# EAGLE board Adafruit Ultimate GPS USB Micro B (EAGLE 9.3.2)
REV: A
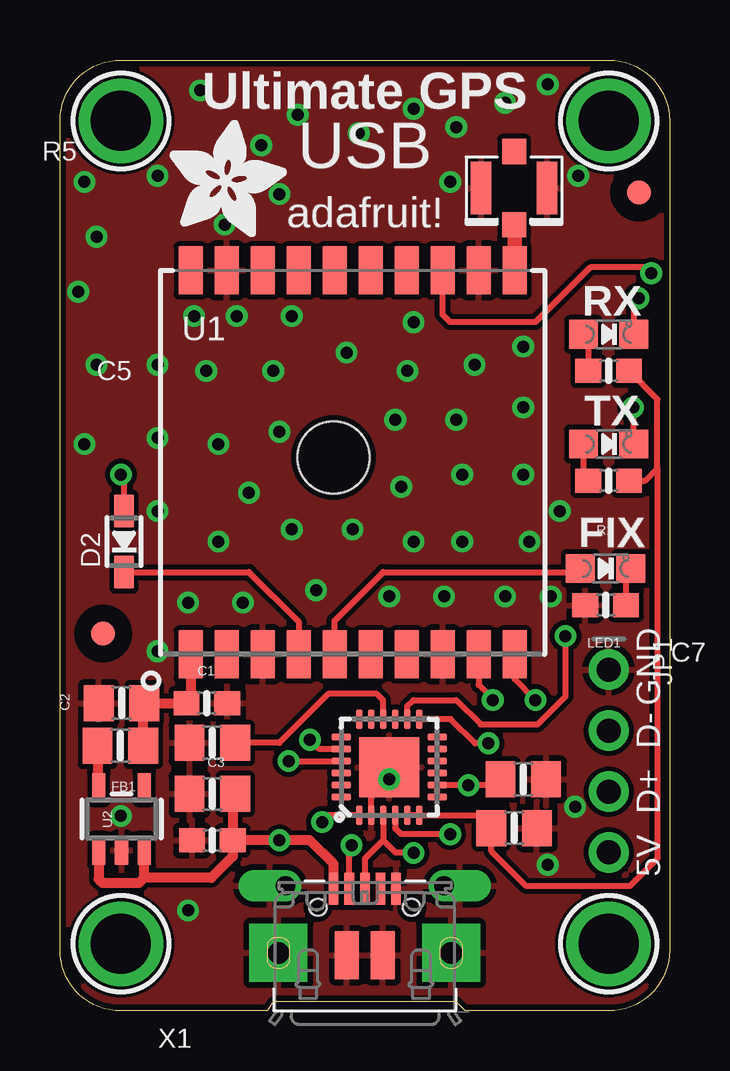
[diagram p0: board, top side]
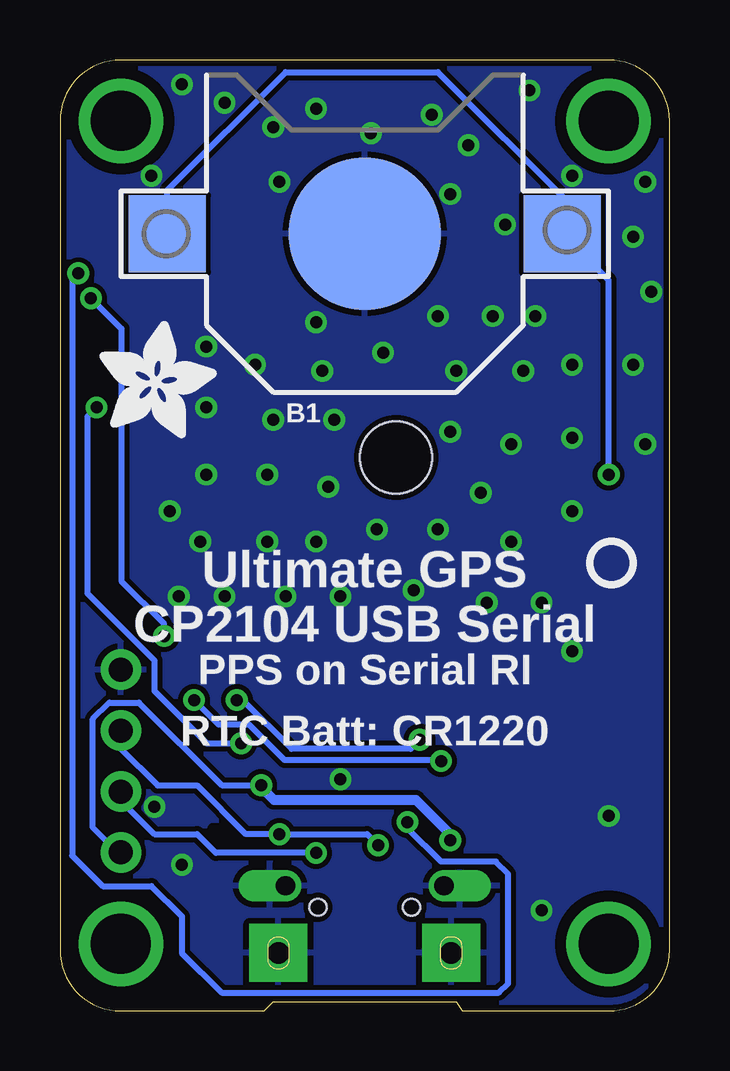
[diagram p1: board, bottom side, seen from below]

Size 25.4 x 39.62 mm. Coordinates in mm from the lower left corner, seen from the top.
Outline: 0,2.54 0,37.08 arc-90 2.54,39.62 22.86,39.62 arc-90 25.4,37.08 25.4,2.54 arc-90 22.86,0 16.89,0 16.51,0.38 8.89,0.38 8.64,0 2.54,0 arc-90 0,2.54
Copper layers (1*16): Top 0.035mm / dielectric 1.5mm / Bottom 0.035mm
Design rules "adafruit": minimum track width 8mil, minimum drill 15.5mil, track to track 8mil, track to pad 8mil, pad to pad 8mil, via to via 8mil, smd to smd 8mil, copper to edge 10mil, drill to drill 8mil, minimum pad ring 10mil, minimum via ring 8mil, stop-mask expansion 2mil, vias tented up to drill 20mil, thermal gap 10mil
bRestrict: area 18.9,7.1 to 19.1,7.6

## Footprints (pad centres in the part's own frame; a part is rotated, then mirrored left to right if it is on the bottom)
CR1220 = smd 3.2 x 3.2: +$1 -8.225,0; +$2 8.225,0 | smd 6.35 x 6.35: - 0,0
0603-NO = smd 1.075 x 1: 1 -0.85,0; 2 0.85,0
0805-NO = smd 1.24 x 1.5: 1 -0.95,0; 2 0.95,0
SOD-323 = smd 1.35 x 0.8: A 1.27,0; C -1.27,0
CHIPLED_0805_NOOUTLINE = smd 1.2 x 1.2: A 0,-1.05; C 0,1.05
FIDUCIAL_1MM = smd 1 x 1: 1 0,0
1X04_ROUND = drill 1 pad 1.676: 1 -3.81,0; 2 -1.27,0; 3 1.27,0; 4 3.81,0
FGPMMOPA6H = smd 2 x 1: P$1 -8,6.75; P$2 -8,5.25; P$3 -8,3.75; P$4 -8,2.25; P$5 -8,0.75; P$6 -8,-0.75; P$7 -8,-2.25; P$8 -8,-3.75; P$9 -8,-5.25; P$10 -8,-6.75; P$11 8,-6.75; P$12 8,-5.25; P$13 8,-3.75; P$14 8,-2.25; P$15 8,-0.75; P$16 8,0.75; P$17 8,2.25; P$18 8,3.75; P$19 8,5.25; P$20 8,6.75 | hole 3: 0.2,0.8
SOT23-5 = smd 0.55 x 1.2: 1 -0.95,-1.3; 2 0,-1.3; 3 0.95,-1.3; 4 0.95,1.3; 5 -0.95,1.3
QFN24_4MM_SMSC = smd 0.8 x 0.28: 1 -2,1.25; 2 -2,0.75; 3 -2,0.25; 4 -2,-0.25; 5 -2,-0.75; 6 -2,-1.25; 13 2,-1.25; 14 2,-0.75; 15 2,-0.25; 16 2,0.25; 17 2,0.75; 18 2,1.25 | smd 0.28 x 0.8: 7 -1.25,-2; 8 -0.75,-2; 9 -0.25,-2; 10 0.25,-2; 11 0.75,-2; 12 1.25,-2; 19 1.25,2; 20 0.75,2; 21 0.25,2; 22 -0.25,2; 23 -0.75,2; 24 -1.25,2 | smd 2.5 x 2.5: THERM 0,0
MOUNTINGHOLE_2.5_PLATED = drill 2.5 pad 3.2: P$1 0,0
U.FL = smd 2.2 x 0.85: P$1 0,1.375; P$2 0,-1.375 | smd 1.05 x 1: P$3 1.525,0; P$4 -1.525,0
4UCONN_20329_V2 = smd 1 x 2: BASE@1 -0.75,-2; BASE@2 0.75,-2 | smd 0.4 x 1.35: D+ 0,0.775; D- -0.65,0.775; GND 1.3,0.775; ID 0.65,0.775; VBUS -1.3,0.775 | drill 0.8 pad 1.143 offset: SPRT@1 -3.3,0.9; SPRT@2 3.3,0.9 | drill 0.9 pad 2.413 square: SPRT@3 -3.6,-1.9; SPRT@4 3.6,-1.9 | hole 0.7: -1.95,0; 1.95,0

## Placement (x,y rotation side)
B1  CR1220  [CR1220]  12.7,32.38 0 bottom
C1  0.1uF  [0603-NO]  6.12,12.83 0 top
C2  10uF  [0805-NO]  2.56,12.83 180 top
C3  10uF  [0805-NO]  6.35,9.04 180 top
C4  10uF  [0805-NO]  6.35,11.18 180 top
C5  10uF  [0805-NO]  19.3,9.65 0 top
C6  10uF  [0805-NO]  18.92,7.62 0 top
C7  0.1uF  [0603-NO]  6.35,7.11 180 top
D2  CUS520  [SOD-323]  2.67,19.56 90 top
D3  YELLOW  [CHIPLED_0805_NOOUTLINE]  22.86,28.19 270 top
D4  YELLOW  [CHIPLED_0805_NOOUTLINE]  22.86,23.62 270 top
FB1  Ferrite  [0805-NO]  2.52,11.05 0 top
FID1  FIDUCIAL_1MM  [FIDUCIAL_1MM]  24.13,34.1 0 top
FID2  FIDUCIAL_1MM  [FIDUCIAL_1MM]  1.8,15.73 0 top
JP1  [1X04_ROUND]  22.86,10.41 270 top
LED1  RED  [CHIPLED_0805_NOOUTLINE]  22.73,18.44 270 top
R1  1K  [0603-NO]  22.73,16.91 0 top
R4  1K  [0603-NO]  22.86,26.67 0 top
R5  1K  [0603-NO]  22.86,22.1 0 top
U1  FGPMMOPA6H  [FGPMMOPA6H]  12.19,22.86 90 top
U2  AP2112-3.3K  [SOT23-5]  2.56,8 0 top
U3  CP2104  [QFN24_4MM_SMSC]  13.72,10.16 90 top
U$8  MOUNTINGHOLE2.5  [MOUNTINGHOLE_2.5_PLATED]  2.54,37.08 0 top
U$9  MOUNTINGHOLE2.5  [MOUNTINGHOLE_2.5_PLATED]  22.86,37.08 0 top
U$13  [ADAFRUIT_5MM]  4.57,32.26 0 top
U$16  [PCBFEAT-REV-040]  2.41,18.67 0 bottom
U$18  [ADAFRUIT_5MM]  23.75,23.88 0 bottom
U$20  U.FL  [U.FL]  18.92,34.29 270 top
U$35  MOUNTINGHOLE2.5  [MOUNTINGHOLE_2.5_PLATED]  22.86,2.79 0 top
U$36  MOUNTINGHOLE2.5  [MOUNTINGHOLE_2.5_PLATED]  2.54,2.79 0 top
X1  20329  [4UCONN_20329_V2]  12.7,4.32 0 top

## Library data of the parts
B1 C1-C7 D2-D4 FB1 JP1 LED1 R1 R4 R5 U1-U3 U$13 U$16 U$18 U$20 X1 = microbuilder
FID1 FID2 U$8 U$9 U$35 U$36 = microbuilder; BOM: EXCLUDE

## Nets
1PPS: U1.P$13 U3.1
3.3V: C1.1 C2.1 FB1.2 U1.P$1
D+: JP1.3 U3.3 X1.D+
D-: JP1.2 U3.4 X1.D-
FIX: LED1.A U1.P$5
GND: B1.- C1.2 C2.2 C3.2 C4.2 C5.2 C6.2 C7.2 JP1.1 R1.1 U1.P$3 U1.P$8 U1.P$12 U1.P$19 U2.2 U3.2 U3.THERM U$20.P$1 U$20.P$2 X1.BASE@1 X1.BASE@2 X1.GND X1.SPRT@1 X1.SPRT@2 X1.SPRT@3 X1.SPRT@4
GPS_RX: U1.P$10 U3.21
GPS_TX: U1.P$9 U3.20
N$1: B1.+$1 B1.+$2 D2.A
N$2: LED1.C R1.2
N$3: FB1.1 U2.5
N$4: U1.P$11 U$20.P$3
N$8: D3.A R4.1
N$9: D4.A R5.1
N$10: D3.C U3.14
N$11: D4.C U3.13
VBACKUP: D2.C U1.P$4
VBUS: C3.1 C5.1 C7.1 JP1.4 U2.1 U2.3 U3.7 U3.8 X1.VBUS
VDDIO: C6.1 R4.2 R5.2 U3.5 U3.6
VPP: C4.1 U3.16

## Tracks (layer width: path | path; a pad name or v marks a point on that pad's centre or on a via)
1PPS  (via drill 0.5)
  Top 0.254: U3.1 11.21,8.16 v10.92,7.87 | v24.64,30.73 24.64,30.99 22.1,30.99 19.81,28.7 16.26,28.7 15.94,29.02 U1.P$13
  Bottom 0.254: v24.64,30.73 24.89,30.48 24.89,6.48 23.62,5.21 21.59,5.21 20.32,3.94 20.32,2.41 18.67,0.76 7.11,0.76 6.73,1.14 6.73,5.71 7.24,6.22 9.53,6.22 10.92,7.62 v10.92,7.87
3.3V
  Top 0.406: U1.P$1 5.44,13 C1.1 C2.1 3.47,12.78 FB1.2
D+  (via drill 0.5)
  Top 0.254: U3.3 13.47,7.12 | 13.47,7.12 12.7,6.35 X1.D+ | 13.47,7.12 13.98,6.6 14.73,6.6 v14.73,6.58
  Bottom 0.254: v14.73,6.58 18.9,6.58 19.68,7.37 21.46,7.37 22.86,8.76 JP1.3
D-  (via drill 0.5)
  Top 0.254: X1.D- 12.05,6.81 v12.15,6.9 | v16.26,7.37 14.22,7.37 13.97,7.62 U3.4
  Bottom 0.254: v12.15,6.9 12.61,7.37 v16.26,7.37 17.65,7.37 19.68,9.4 21.34,9.4 22.86,10.92 JP1.2
FIX
  Top 0.254: U1.P$5 11.44,16.27 13.46,18.29 21.53,18.29 LED1.A
GND  (via drill 0.5)
  Top 0.254: U3.2 12.97,8.9 v13.72,9.65
  other vias: 2.54,8.13 4.06,14.99 5.33,17.02 7.62,17.02 10.67,17.53 13.72,17.27 16,17.27 18.54,17.27 5.59,28.96 7.37,28.96 9.65,28.96 14.73,28.7 19.3,27.69 6.86,32.77 16.26,34.54 16.51,36.83 21.59,34.8 20.32,38.61 14.73,37.59 12.45,36.58 9.14,34.04 8.38,36.07 1.02,34.54 1.52,32.26 0.76,29.97 1.52,26.92 1.02,23.62 4.06,23.88 4.06,26.92 6.1,26.67 8.89,26.67 11.94,27.43 14.48,26.67 17.27,26.92 19.3,25.15 16.51,24.64 13.97,24.64 9.14,24.13 6.6,23.62 4.06,20.83 6.6,19.56 7.87,21.59 9.65,20.07 12.19,20.07 14.22,21.84 16.76,22.35 19.3,22.35 19.56,19.56 16.76,19.56 14.73,19.56 21.46,8.51 20.32,6.1 20.45,17.27 9.91,37.34 18.54,37.85 5.84,38.35 4.06,34.8 20.83,20.83 5.33,4.19
  pour Top (isolate 0.203): 0,0 0,39.62 25.4,39.62 25.4,0
  pour Bottom (isolate 0.203): 0,0 0,39.62 25.4,39.62 25.4,0
GPS_RX  (via drill 0.5)
  Top 0.254: v9.53,10.41 9.56,10.38 11.69,10.38 U3.21 | v19.81,12.95 18.94,13.82 U1.P$10
  Bottom 0.254: v9.53,10.41 9.58,10.46 16.05,10.46 17.53,11.94 18.8,11.94 v19.81,12.95
GPS_TX  (via drill 0.5)
  Top 0.254: U3.20 10.81,10.91 v10.41,11.3 | U1.P$9 17.44,13.59 18.03,13 v18.03,12.95
  Bottom 0.254: v10.41,11.3 10.79,10.92 15.75,10.92 17.78,12.95 v18.03,12.95
N$1  (via drill 0.5)
  Top 0.254: D2.A 2.67,22.22 v2.54,22.35
  Bottom 0.254: v2.54,22.35 2.54,30.45 4.08,31.99 | 4.08,31.99 B1.+$2 | B1.+$1 20.93,34.19 16,39.12 9.65,39.12 4.08,33.54 4.08,31.99
N$2
  Top 0.254: LED1.C 23.58,18.24 R1.2
N$3
  Top 0.406: FB1.1 1.57,9.35 U2.5
N$4
  Top 0.61: U1.P$11 18.94,32.75 U$20.P$3
N$8
  Top 0.254: D3.A 22.01,27.99 R4.1
N$9
  Top 0.254: D4.A 21.81,22.3 R5.1
N$10  (via drill 0.5)
  Top 0.254: U3.14 14.47,12.69 14.73,12.95 16.51,12.95 17.53,11.94 19.9,11.94 21.06,13.09 v21.06,15.62 | v24.11,29.7 23.91,29.5 D3.C
  Bottom 0.254: v21.06,15.62 21.06,16.13 22.84,17.91 22.84,28.43 v24.11,29.7
N$11  (via drill 0.5)
  Top 0.254: D4.C 23.88,23.66 v23.88,25.15 | U3.13 16.29,12.16 17.29,11.15 v17.85,11.15
  Bottom 0.254: v23.88,25.15 24.26,24.77 24.26,17.4 21.46,14.61 21.46,13.33 19.28,11.15 v17.85,11.15
VBACKUP
  Top 0.254: D2.C 7.87,18.29 9.94,16.22 U1.P$4
VBUS  (via drill 0.5)
  Top 0.254: C5.1 18.21,9.79 17.83,9.41 v17.02,9.41 U3.8 U3.7
  Top 0.406: U2.1 1.61,5.5 1.78,5.33 3.3,5.33 3.51,5.55 | 3.51,5.55 U2.3 | C7.1 7.2,6.44 6.31,5.55 3.51,5.55 | C3.1 7.2,8.94 C7.1 | X1.VBUS 11.4,6.13 10.41,7.11 v9.14,7.11 C7.1
  Bottom 0.254: v17.02,9.41 18.67,9.41 22.11,12.85 23.34,12.85 24.03,12.17 24.03,7.64 22.99,6.6 JP1.4
  Bottom 0.406: v17.02,9.41 17.02,9.32 16.48,8.79 10.57,8.79 9.14,7.37 v9.14,7.11
VDDIO
  Top 0.254: U3.5 U3.6 17.49,8.16 18,7.65 C6.1 17.97,6.66 19.43,5.21 23.75,5.21 24.89,6.35 24.89,22.61 | R5.2 24.38,22.1 24.89,22.61 | R4.2 24.89,25.49 24.89,22.61
VPP
  Top 0.254: U3.16 13.47,12.95 13.21,13.21 11.18,13.21 9.14,11.18 C4.1

## Text on the board
tPlace: Ultimate GPS | USB | adafruit! | RX | TX | FIX | GND | D- | D+ | 5V
bPlace: Ultimate GPS / CP2104 USB Serial | PPS on Serial RI | RTC Batt: CR1220